# Altium PCB WRIP-ELECTRONICS usb(1).PcbDoc
Units mm, origin at the board's own origin, x right, y up, seen from the top; angles counter-clockwise.
Board outline 9.72 x 6.48 mm, 2 copper layers (F.Cu, B.Cu); 5 components, 8 nets, 24 pads, 3 vias.
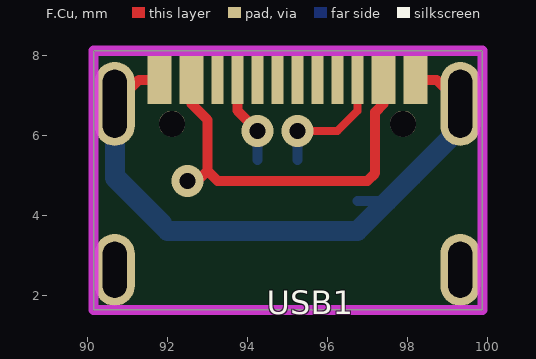
[diagram p0: F.Cu view]
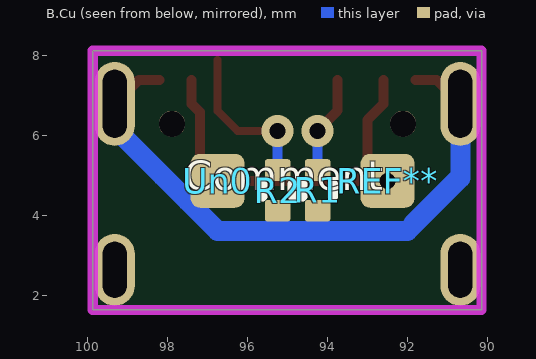
[diagram p1: B.Cu view, seen from below]

## Layer stack, top to bottom
F.Mask: solder mask 0.0102, Solder Resist, Dk 3.5
F.Cu: signal copper 0.0356
Dielectric 1: dielectric 0.32, FR-4, Dk 4.8
B.Cu: signal copper 0.0356
B.Mask: solder mask 0.0102, Solder Resist, Dk 3.5

## Board outline
90.15,8.125 90.15,1.645 99.87,1.645 99.87,8.125 90.15,8.125

## Design rules (kind name [scope] priority, off if disabled: settings)
Clearance [All] p1: gap=0.254 ignorepadtopadclearanceinfootprint=FALSE except(0: Arc-Hole Track-Hole SMDPad-Hole THPad-Hole Via-Hole Fill-Hole Poly-Hole Region-Hole Text-Hole)
MinimumSolderMaskSliver [All] p1: minsoldermaskwidth=0
PolygonConnect [All] p1: connectstyle=Direct reliefconductorwidth=0.254 reliefentries=4 polygonreliefangle="90 Angle" airgapwidth=0.254
RoutingVias [All] p1: holewidth=0.711 width=1.27 viastyle="Through Hole" minholewidth=0.711 minwidth=1.27 maxholewidth=0.711 maxwidth=1.27
SilkToSilkClearance [All] p1: silktosilkclearance=0
SilkToSolderMaskClearance [IsPad] p1: minsilkscreentomaskgap=0 clearancetoexposedcopper=TRUE
SolderMaskExpansion [All] p1: expansion=0.102 istentingtop=FALSE
Width [All] p1: maxlimit=10 minlimit=0.254 preferedwidth=0.254 minimp=50.000000 maximp=50.000000 favimp=50.000000
27 further rules are at their usual default settings.

## Components (designator, comment, footprint, x,y, rotation, side; value= is the part's Value field where it differs from the comment)
R1 "5.1K" R_0402_1005Metric 94.25,4.635 r90 bottom
R2 "5.1K" R_0402_1005Metric 95.25,4.635 r90 bottom
REF** "Probing_pad" Probing_pad 92.5,4.875 r0 bottom
Un0 "Comment" ? 96.75,4.875 r0 bottom
USB1 "~" "USB TYPE-C CONNECTOR - HANBO - MC-107D" 95,0 r0 top

## Footprints (in the part's own frame and the unit in brackets; to place one, negate y for a bottom-side part, rotate by r counter-clockwise, add the part's x,y. Pads: shape width x height; smd on the part's side, far side on the other; paste and mask are expansions set on the pad)
Probing_pad [mm]
  rrect35% 1.35x1.35 smd mask+0: 1(0,0)
R_0402_1005Metric [mm]
  rrect25% 0.54x0.64 smd mask+0: 1(0.51,0) 2(-0.51,0)
  silkscreen extent -0.15,-0.38 0.15,0.38
"USB TYPE-C CONNECTOR - HANBO - MC-107D" [mm]
  rect 0.6x1.2 smd mask+0: A1(3.2,7.4) A4(2.4,7.4) B9(-2.4,7.4) B12(-3.2,7.4)
  rect 0.3x1.2 smd mask+0: A5(-1.25,7.4) A6(-0.25,7.4) A7(0.25,7.4) A8(1.25,7.4) B5(1.75,7.4) B6(0.75,7.4) B7(-0.75,7.4) B8(-1.75,7.4)
  rrect100% 1x2.1 hole 1.7 slot 0.6 at 0 deg paste-2539.97 mask+0: Un1(-4.32,6.8) Un5(4.32,6.8)
  rrect100% 1x1.8 hole 1.4 slot 0.6 at 0 deg paste-2539.97 mask+0: Un2(-4.32,2.65) Un6(4.32,2.65)
  round 0.65 hole 0.65 paste-2539.97 mask+0: Un3(-2.89,6.3) Un4(2.89,6.3)
? [mm]
  rrect35% 1.35x1.35 smd mask+0: 1(0,0)

## Part data
R1 R2: library part R_0402_1005Metric, "Resistor SMD 0402 (1005 Metric), square (rectangular) end terminal, IPC_7351 nominal, (Body size source: IPC-SM-782 page 72, https://www.pcb-3d.com/wordpress/wp-content/uploads/ipc-sm-782a_amendment_1_and_2.pdf), generated with kicad-footprint-generator", Sheetfile="WRIP-ELECTRONICS usb.kicad_sch", ki_description=Resistor, ki_keywords="R res resistor"
USB1: library part "USB TYPE-C CONNECTOR - HANBO - MC-107D", Sheetfile="WRIP-ELECTRONICS usb.kicad_sch"

## Via types
v1: diameter 0.8, hole 0.4, F.Cu to B.Cu, tented both sides, 3 vias

## Nets (pads, with @x,y where several pads share a name; then routed paths per layer and width w, separated by ;. In a path a pad name is that pad's centre, name@x,y a point inside that pad or via, vN(x,y) a via of type N, cw(c..) or ccw(c..) an arc to the next point about the centre after c; other vN are vias at no path point)
GND: R1.2 R2.2 Un0.1 USB1.A1 USB1.B12 USB1.Un1 USB1.Un5 | length 19.1
  F.Cu w0.25: USB1.Un1 91.28,7.4 USB1.B12 ; USB1.A1 98.72,7.4 USB1.Un5
  B.Cu w0.25: USB1.Un1 90.68,5.162 91.967,3.875 ; Un0.1@96.75,4.375 97.5,4.375
  B.Cu w0.5: USB1.Un1 90.68,4.945 92,3.625 96.75,3.625 97.5,4.375 98.125,5 USB1.Un5@99.32,6.195
Net-(USB1-CC1): R1.1 USB1.A5 | length 2.2
  F.Cu w0.25: USB1.A5 93.75,6.625 v1(94.25,6.125)
  B.Cu w0.25: R1.1@94.25,5.395 v1(94.25,6.125)
Net-(USB1-CC2): R2.1 USB1.B5 | length 3.7
  F.Cu w0.2: v1(95.25,6.125) 96.25,6.125 96.75,6.625 USB1.B5@96.75,7.9
  B.Cu w0.25: R2.1@95.25,5.395 v1(95.25,6.125)
unconnected-(USB1-D+-PadA6): USB1.A6
unconnected-(USB1-D+-PadB6): USB1.B6
unconnected-(USB1-D--PadA7): USB1.A7
unconnected-(USB1-D--PadB7): USB1.B7
vin: REF**.1 USB1.A4 USB1.B9 | length 9.8
  F.Cu w0.25: v1(92.5,4.875) 92.75,4.875 93,5.125 ; USB1.B9 92.6,6.8 93,6.4 93,5.125 ; USB1.A4 97.4,6.8 97.19,6.59 97.19,5.065 97,4.875 93.25,4.875 93,5.125
pads on no net: USB1.A8 USB1.B8 USB1.Un2 USB1.Un3 USB1.Un4 USB1.Un6

## Keep-outs
Edge.Cuts:
  lines w0: 90.15,1.645 99.87,1.645 99.87,8.125 90.15,8.125 90.15,1.645
  lines w0.254: 90.15,1.645 99.87,1.645 99.87,8.125 90.15,8.125 90.15,1.645